# Altium PCB Midas.PcbDoc
Units mm, origin at the board's own origin, x right, y up, seen from the top; angles counter-clockwise.
Board outline 95.22 x 95.2 mm, 2 copper layers (Top Layer, Bottom Layer); 9 components, 16 nets, 67 pads, 0 vias.
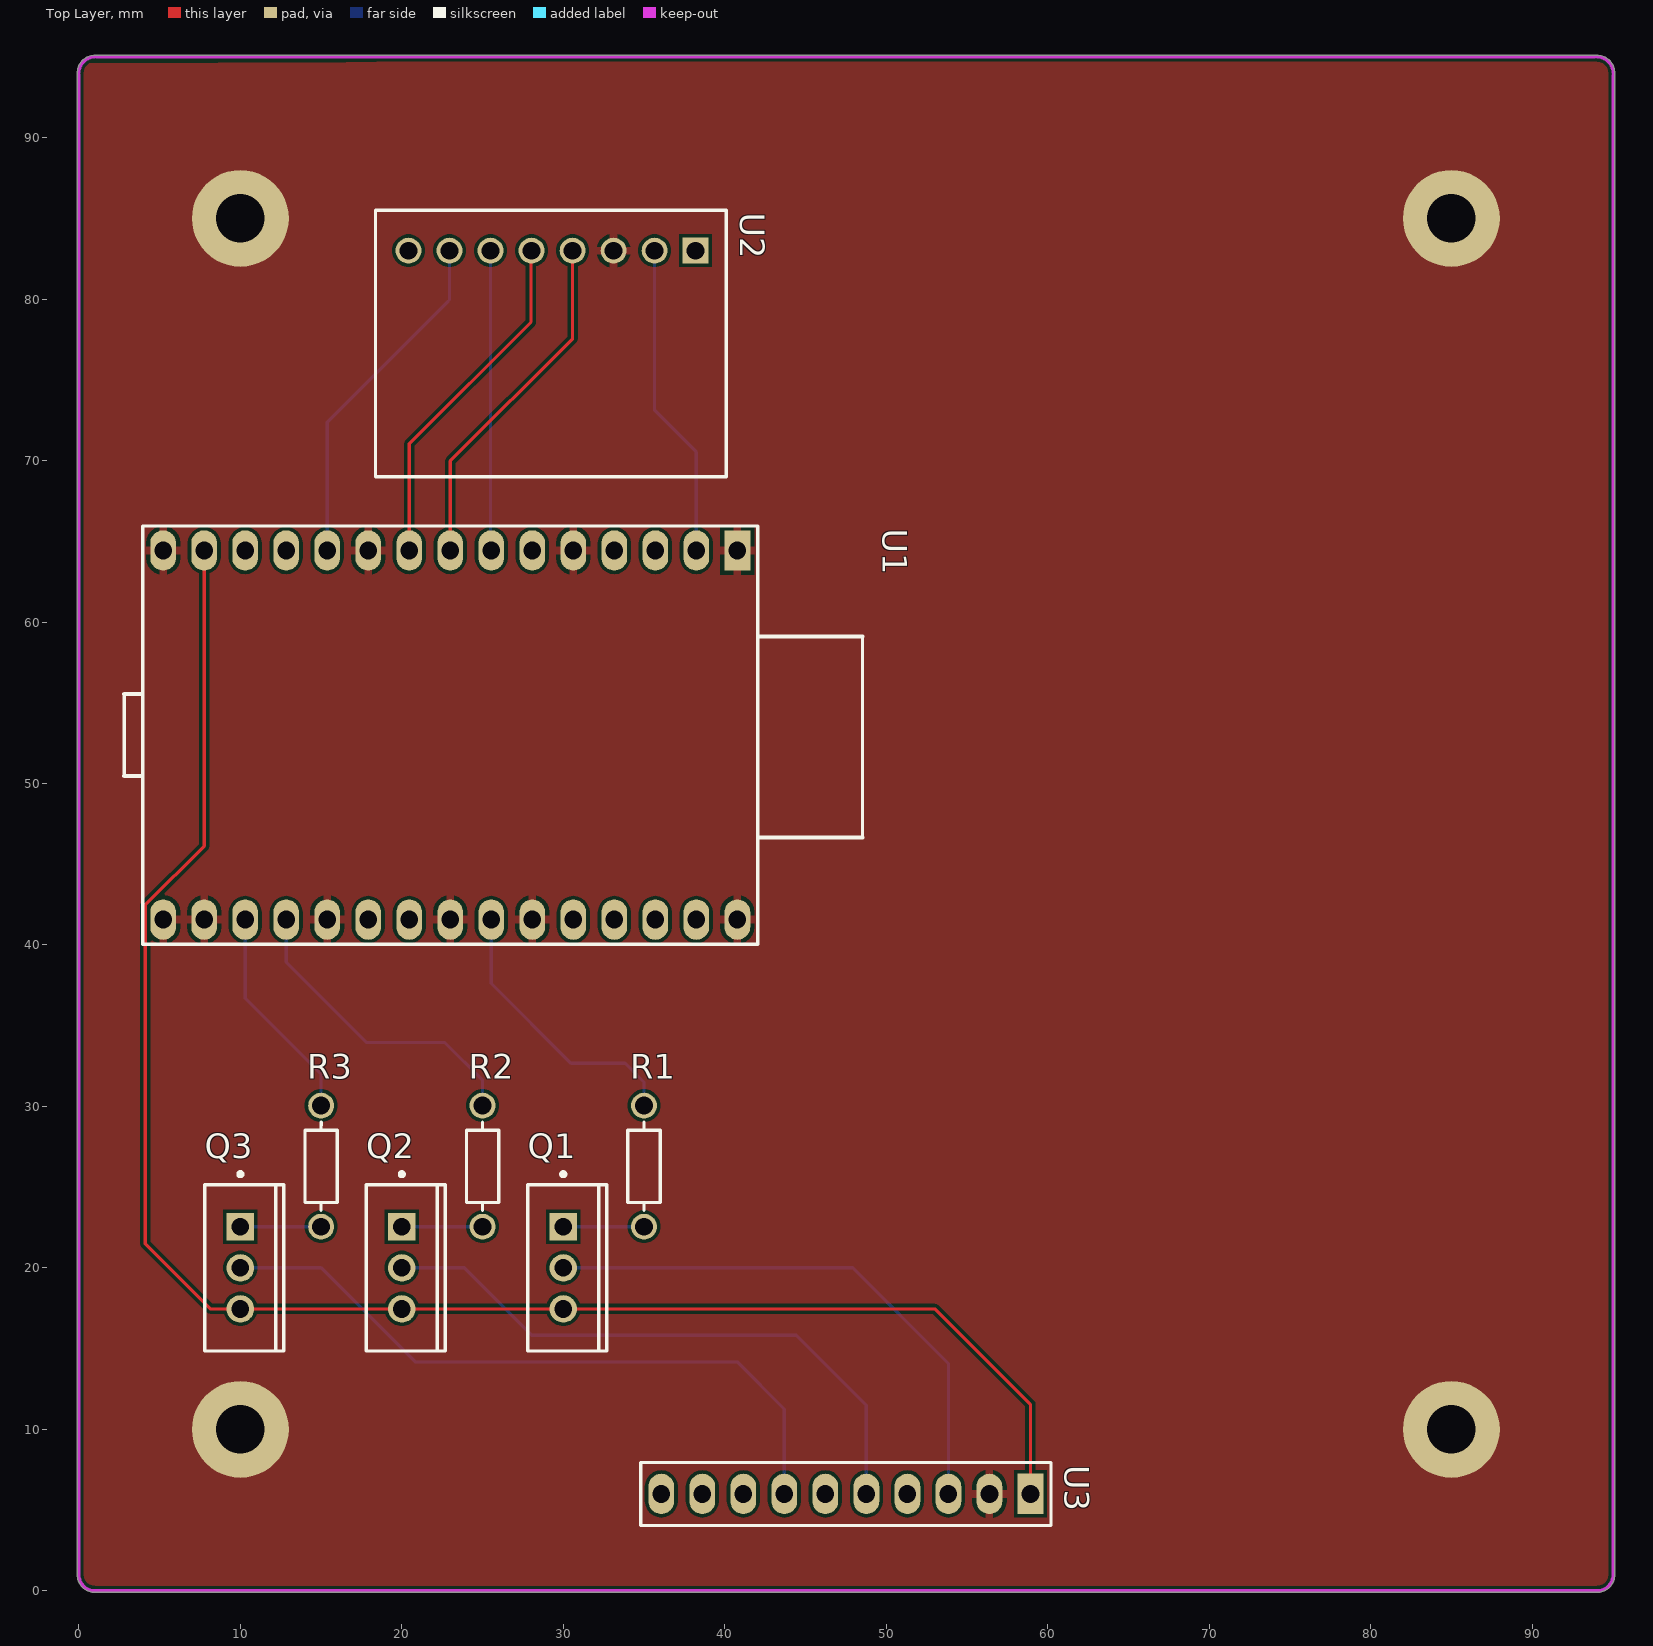
[diagram p0: Top Layer view]
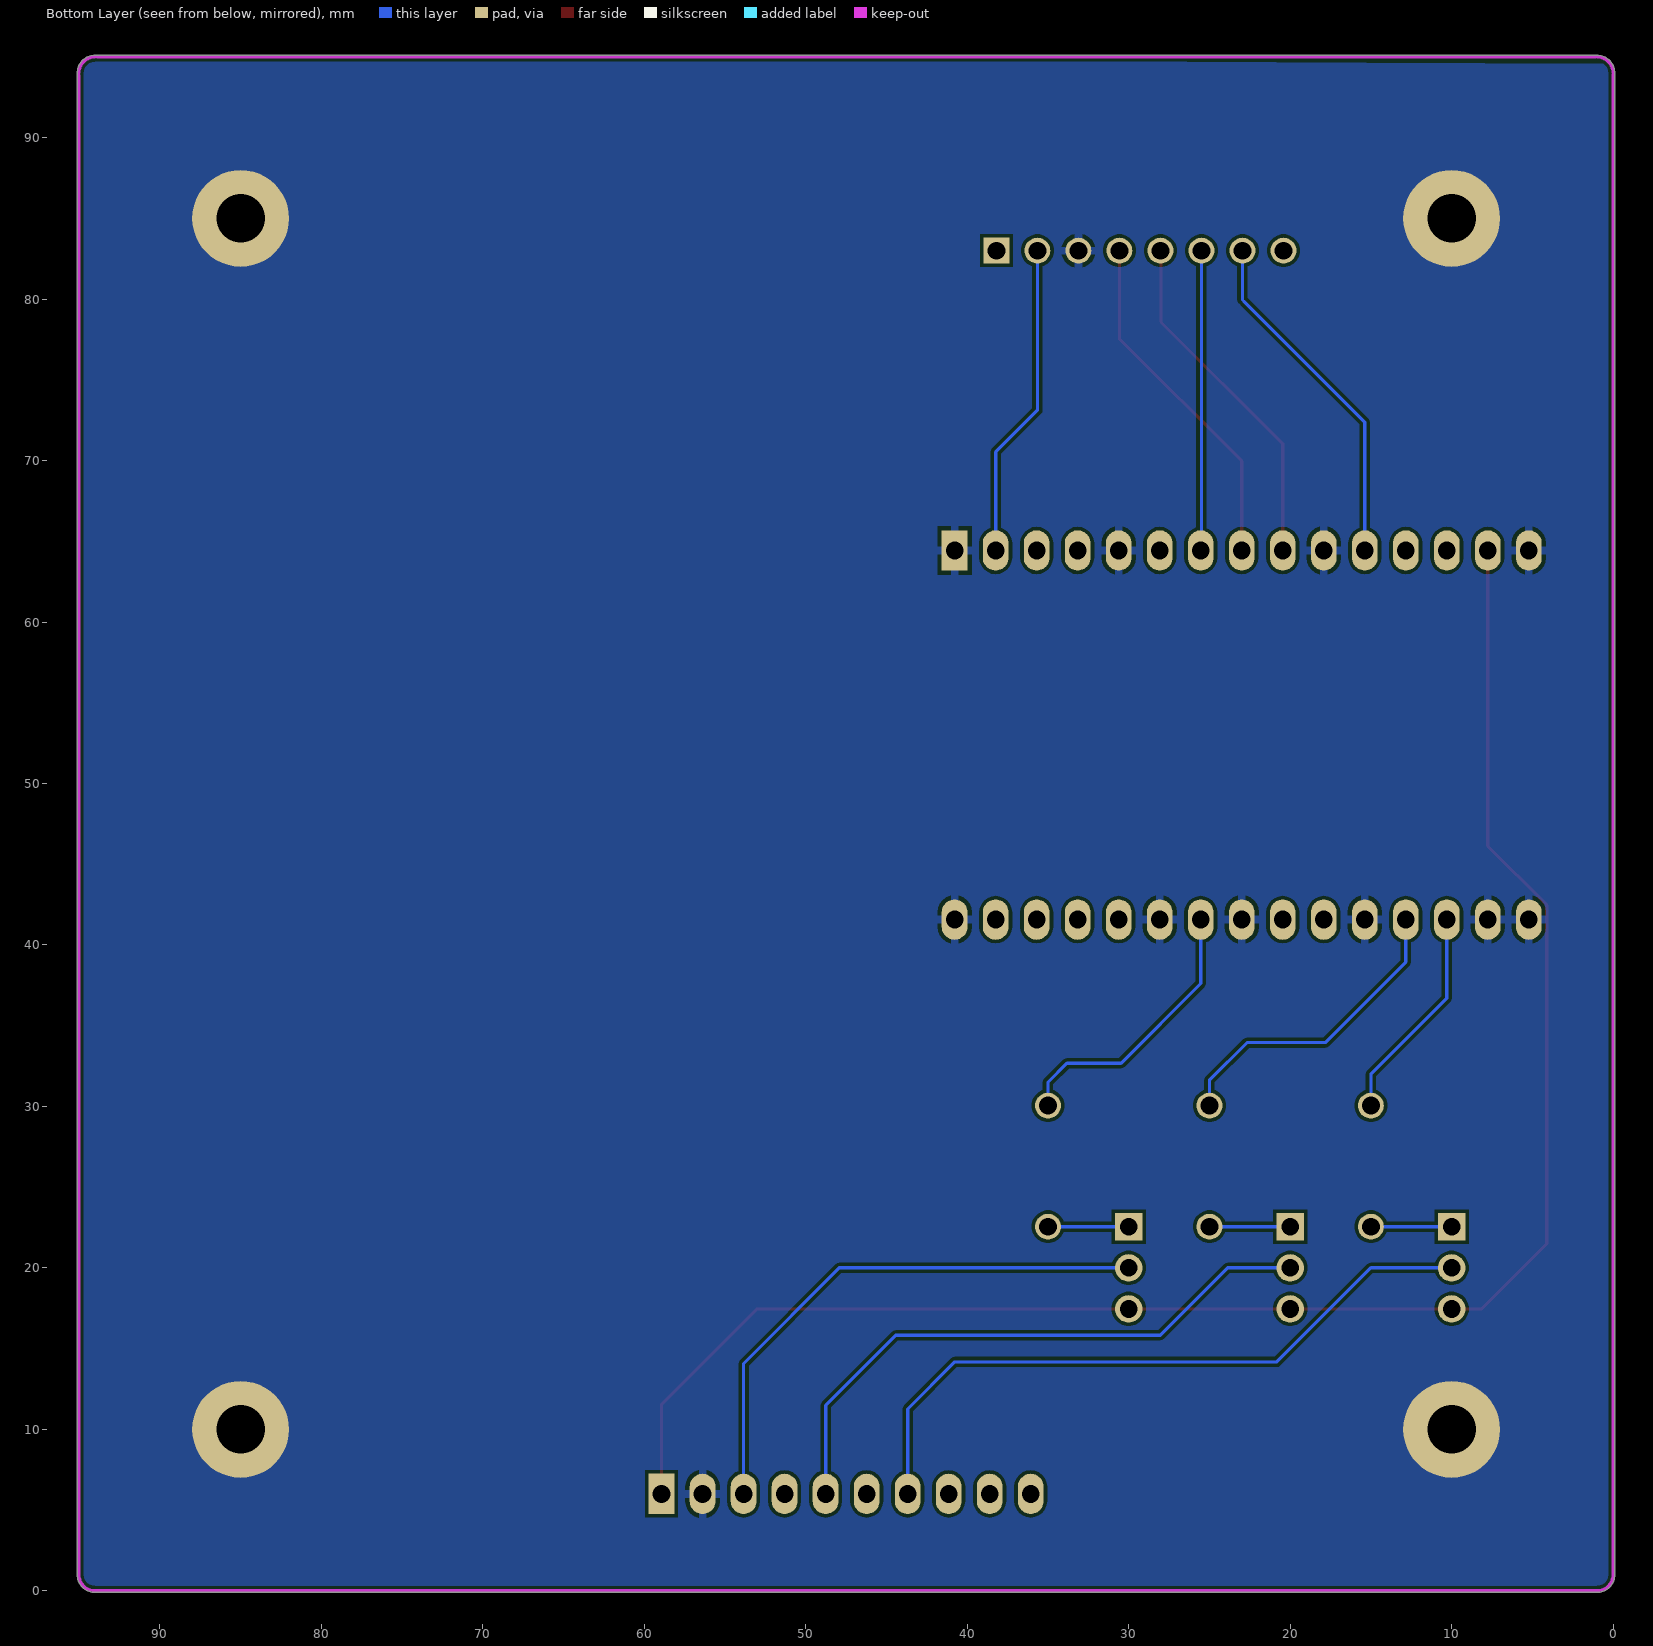
[diagram p1: Bottom Layer view, seen from below]
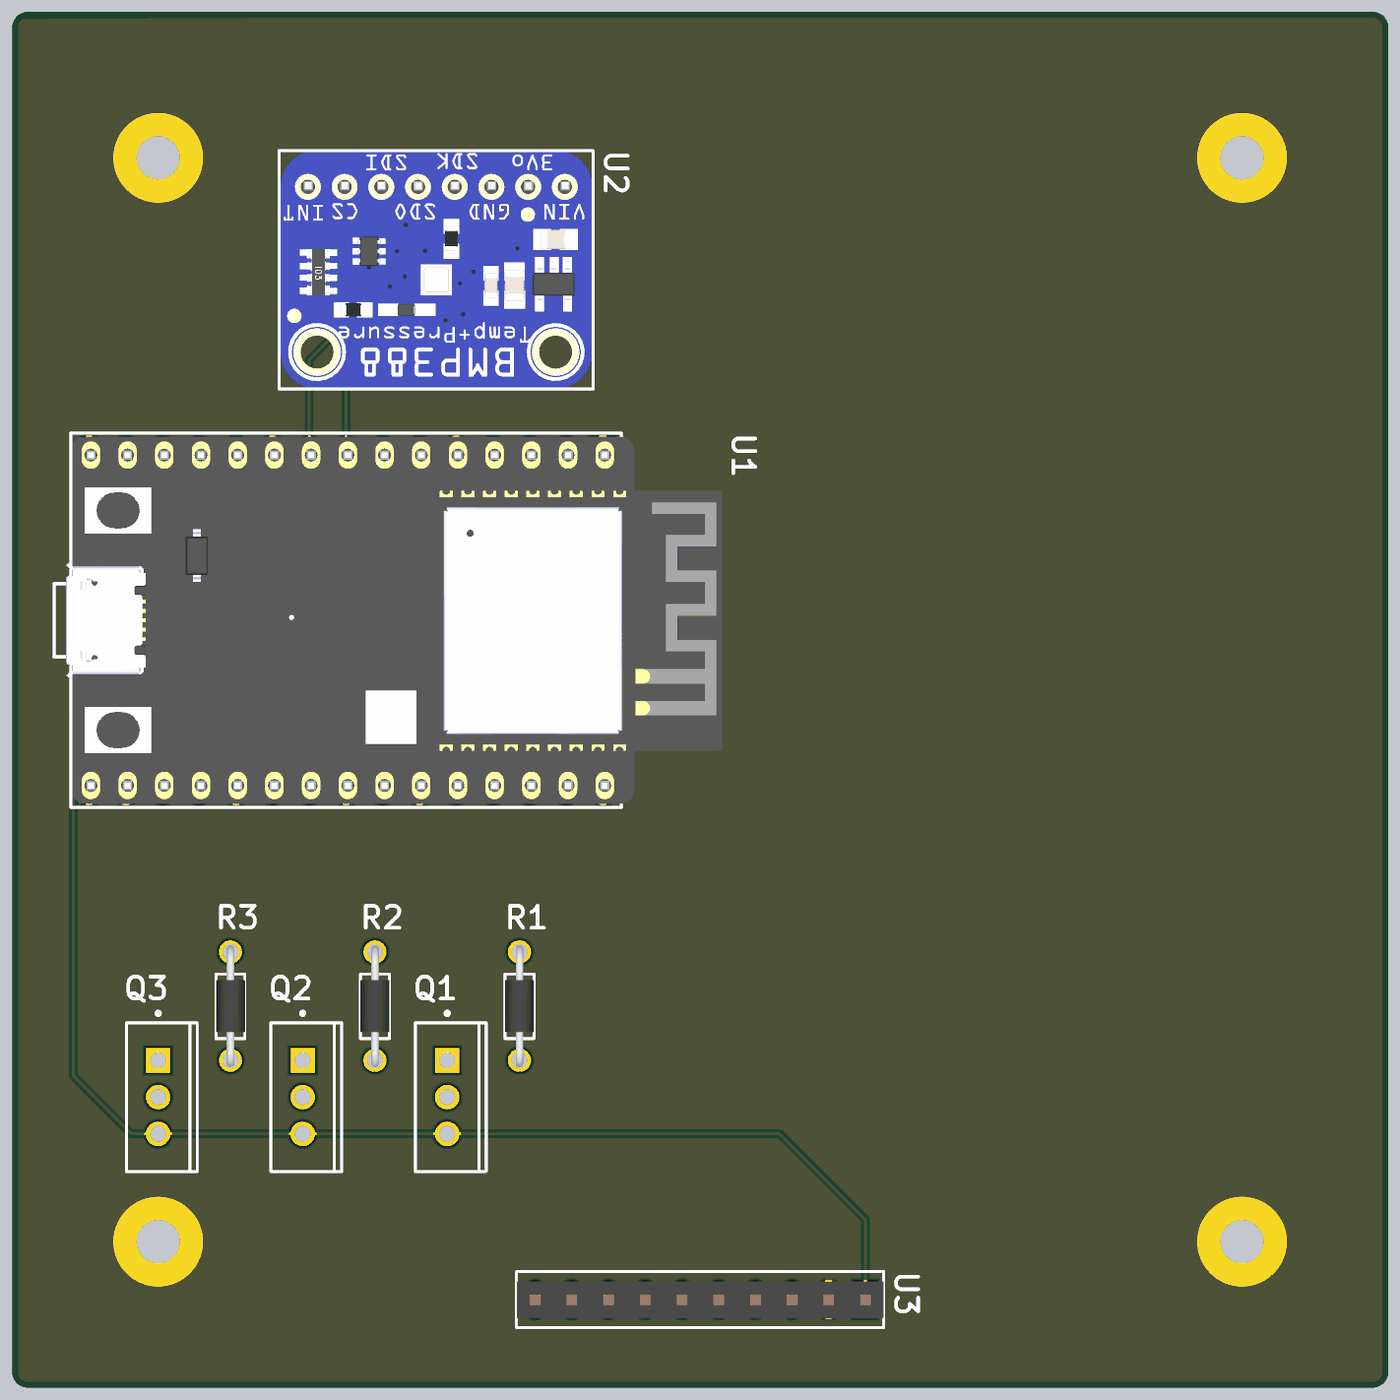
[diagram p2: 3D render of the assembled board from above, using the file's embedded part models]

## Layer stack, top to bottom
Top Solder: solder mask 0.0102, Solder Resist, Dk 3.5
Top Layer: signal copper 0.0356
Dielectric 1: dielectric 0.32, FR-4, Dk 4.8
Bottom Layer: signal copper 0.0356
Bottom Solder: solder mask 0.0102, Solder Resist, Dk 3.5

## Board outline
0.999,-0.1 cw(c1,1) -0.1,1 -0.1,94 cw(c1,94) 1,95.1 93.9,95.1 94.02,95.1 cw(c94.02,94) 95.12,94 95.12,93.88 95.12,1 cw(c94.02,1) 94.02,-0.1

## Design rules (kind name [scope] priority, off if disabled: settings)
BoardOutlineClearance [All] p1: gap=0.2 ignorepadtopadclearanceinfootprint=FALSE except(0.4: Arc-SplitBarrior Arc-SplitContinuation Track-SplitBarrior Track-SplitContinuation SMDPad-SplitBarrior SMDPad-SplitContinuation THPad-SplitBarrior THPad-SplitContinuation Via-SplitBarrior Via-SplitContinuation Fill-SplitBarrior Fill-SplitContinuation Poly-SplitBarrior Poly-SplitContinuation Region-SplitBarrior Region-SplitContinuation Text-SplitBarrior Text-SplitContinuation)
Clearance "Clearance Bottom Layer" [OnLayer('Bottom Layer')] p1: gap=0.203 ignorepadtopadclearanceinfootprint=TRUE except(0.254: Arc-Text Track-Text SMDPad-Text THPad-Text Via-Text Fill-Text Poly-Text Region-Text Text-Text)
Clearance "Clearance Top Layer" [OnLayer('Top Layer')] p2: gap=0.203 ignorepadtopadclearanceinfootprint=TRUE except(0.254: Arc-Text Track-Text SMDPad-Text THPad-Text Via-Text Fill-Text Poly-Text Region-Text Text-Text)
Clearance Clearance_1 [OnMid vs OnMid] p3: gap=0.254 ignorepadtopadclearanceinfootprint=FALSE except(0: Arc-Hole Track-Hole SMDPad-Hole THPad-Hole Via-Hole Fill-Hole Poly-Hole Region-Hole Text-Hole)
Clearance Clearance_2 [(ExistsOnLayer('Top Layer') Or ExistsOnLayer('Bottom Layer')) vs (ExistsOnLayer('Top Layer') Or ExistsOnLayer('Bottom Layer'))] p4: gap=0.254 ignorepadtopadclearanceinfootprint=FALSE except(0: Arc-Hole Track-Hole SMDPad-Hole THPad-Hole Via-Hole Fill-Hole Poly-Hole Region-Hole Text-Hole)
Clearance [All] p5: gap=0.2 ignorepadtopadclearanceinfootprint=FALSE except(0.089: Arc-Arc Arc-Track Arc-SMDPad Track-Track Track-SMDPad SMDPad-SMDPad; 0.127: Arc-Via Track-Via SMDPad-Via THPad-Via Via-Via; 0.254: Arc-Text Track-Text SMDPad-Text THPad-Text Via-Text Fill-Text Poly-Text Region-Text Text-Text)
HoleSize [All] p1: absolutevalues=TRUE maxlimit=6.3 minlimit=0.2 maxpercent=80.000 minpercent=20.000
MinimumAnnularRing [All] p1: minimumring=0.076
MinimumSolderMaskSliver [All] p1: minsoldermaskwidth=0.1
PolygonConnect PolygonConnect_1 [All] p1: thpad.connectstyle=Relief thpad.reliefconductorwidth=0.508 thpad.reliefentries=4 thpad.polygonreliefangle="90 Angle" thpad.airgapwidth=0.254 smdpad.connectstyle=Relief smdpad.reliefconductorwidth=0.508 smdpad.reliefentries=4 smdpad.polygonreliefangle="90 Angle" smdpad.airgapwidth=0.254 via.connectstyle=Direct via.reliefconductorwidth=0.508 via.reliefentries=4 via.polygonreliefangle="90 Angle" via.airgapwidth=0.254
RoutingCorners [All] p1: cornerstyle=Round minsetback=2.54 maxsetback=2.54
RoutingVias [All] p1: holewidth=0.5 width=1 viastyle="Through Hole" minholewidth=0.2 minwidth=0.45 maxholewidth=1 maxwidth=2
SilkToSilkClearance [All] p1: silktosilkclearance=0.1
SilkToSolderMaskClearance [IsPad] p1: minsilkscreentomaskgap=0.1 clearancetoexposedcopper=TRUE
SolderMaskExpansion [All] p1: expansion=0.102 istentingtop=FALSE
Width [All] p1: maxlimit=2.54 minlimit=0.089 preferedwidth=0.381
25 further rules are at their usual default settings.

## Components (designator, comment, footprint, x,y, rotation, side; value= is the part's Value field where it differs from the comment)
Q1 "TIP102" ONSC-TO-220-3-221A-09 30,20 r0 top
Q2 "TIP102" ONSC-TO-220-3-221A-09 20,20 r0 top
Q3 "TIP102" ONSC-TO-220-3-221A-09 10,20 r0 top
R1 "1.5k" CF18JT1K50 35,26.3 r90 top
R2 "1.5k" CF18JT1K50 25,26.3 r90 top
R3 "1.5k" CF18JT1K50 15,26.3 r90 top
U1 "ESP32" ESP32 23,53 r270 top
U2 "BMP388" 3966 38.195,83 r270 top
U3 "Stackable Pin Bus" STACKABLE_PIN_BUS 47.5,6 r270 top

## Footprints (in the part's own frame and the unit in brackets; to place one, negate y for a bottom-side part, rotate by r counter-clockwise, add the part's x,y. Pads: shape width x height; smd on the part's side, far side on the other; paste and mask are expansions set on the pad)
3966 [mm]
  rect 1.6x1.6 hole 1.1: 1(0,0)
  round 1.6 hole 1.1: 2(0,-2.54) 3(0,-5.08) 4(0,-7.62) 5(0,-10.16) 6(0,-12.7) 7(0,-15.24) 8(0,-17.78)
  silkscreen extent -2.5,-19.82 14,1.9, body extent -2.53,-19.74 13.98,1.85, height 1.47
CF18JT1K50 [mm]
  round 1.6 hole 1.1: 1(-3.75,0) 2(3.75,0)
  silkscreen extent -2.75,-1 2.72,1, body extent -4.2,-1 4.2,0.99, height 2.01
ESP32 [mm]
  rect 2.5x1.6 hole 1.1: 1(-11.43,17.78)
  oval 2.5x1.6 hole 1.1: 2(-11.43,15.24) 3(-11.43,12.7) 4(-11.43,10.16) 5(-11.43,7.62) 6(-11.43,5.08) 7(-11.43,2.54) 8(-11.43,0) 9(-11.43,-2.54) 10(-11.43,-5.08) 11(-11.43,-7.62) 12(-11.43,-10.16) 13(-11.43,-12.7) 14(-11.43,-15.24) 15(-11.43,-17.78) 16(11.43,-17.78) 17(11.43,-15.24) 18(11.43,-12.7) 19(11.43,-10.16) 20(11.43,-7.62) 21(11.43,-5.08) 22(11.43,-2.54) 23(11.43,0) 24(11.43,2.54) 25(11.43,5.08) 26(11.43,7.62) 27(11.43,10.16) 28(11.43,12.7) 29(11.43,15.24) 30(11.43,17.78)
  silkscreen extent -12.95,-20.19 12.95,25.53, body extent -12.7,-19.39 12.7,26.03, height 7.49
ONSC-TO-220-3-221A-09 [mm] "FM, 3-Leads, Body 10.3x4.85mm, Pitch 2.54mm"
  rect 1.7x1.7 hole 1.1: 1(0,2.54)
  round 1.7 hole 1.1: 2(0,0) 3(0,-2.54)
  silkscreen extent -2.2,-5.15 2.7,5.92, body extent -2.18,-5.15 2.67,5.15, height 19.85
STACKABLE_PIN_BUS [mm]
  rect 2.5x1.6 hole 1.1: 1(0,11.43)
  oval 2.5x1.6 hole 1.1: 2(0,8.89) 3(0,6.35) 4(0,3.81) 5(0,1.27) 6(0,-1.27) 7(0,-3.81) 8(0,-6.35) 9(0,-8.89) 10(0,-11.43)
  silkscreen extent -1.94,-12.7 1.95,12.7, body extent -1.25,-12.69 1.29,12.71, height 8

## Part data
R1 R2 R3: library part CF18JT1K50
U1: library part ESP32-C3-DEVKITC-02, Manufacturer="Espressif Systems", Supplier Part Number=1965-ESP32-C3-DEVKITC-02-ND, Category="RF Semiconductors and Devices", Manufacturer Part Number=ESP32-C3-DEVKITC-02, Pricing="1=8 (USD)", RoHS=No, Stock=1074, Supplier=Digikey
U2: library part 3966, "Test Lead, Blk, Red, 139.7MM, 500V 3V ~ 5V / Adafruit Industries LLC / BMP388 - Pressure Sensor Evaluation Board / BMP388", Manufacturer="Adafruit Industries", Supplier Part Number=1528-2733-ND, Category="Pressure Sensors", Manufacturer Part Number=3966, Pricing="1=9,95 (USD)", RoHS=No, Stock=21, Supplier=Digikey
U3: library part "Barramento Empilhável", "10 pinos, Passo 2.54mm, Dimensões da barra 26x2x8mm"

## Free pads (board coordinates)
  round 6 hole 3: GND(10,10) GND(10,85) GND(85,10) GND(85,85)

## Nets (pads, with @x,y where several pads share a name; then routed paths per layer and width w, separated by ;. In a path a pad name is that pad's centre, name@x,y a point inside that pad or via, vN(x,y) a via of type N, cw(c..) or ccw(c..) an arc to the next point about the centre after c; other vN are vias at no path point)
3V3: U1.2 U2.2 | length 19.6
  Bottom Layer w0.2: U2.2 35.655,73.12 38.24,70.535 U1.2
BA0: R1.2 U1.24 | length 17.4
  Bottom Layer w0.2: U1.24 25.54,37.61 30.475,32.675 33.825,32.675 35,31.5 R1.2
BA1: R2.2 U1.19 | length 19.2
  Bottom Layer w0.2: U1.19 12.84,38.935 17.825,33.95 22.675,33.95 25,31.625 R2.2@25,30.2
BA2: R3.2 U1.18 | length 13.5
  Bottom Layer w0.2: U1.18 10.3,36.7 14,33 15,32 R3.2@15,30
BR0: Q1.1 R1.1 | length 5
  Bottom Layer w0.2: Q1.1 R1.1@34.99,22.54
BR1: Q2.1 R2.1 | length 5
  Bottom Layer w0.2: Q2.1 R2.1@24.99,22.54
BR2: Q3.1 R3.1 | length 5
  Bottom Layer w0.2: Q3.1@10.05,22.55 R3.1
C0: Q1.2 U3.3 | length 34.4
  Bottom Layer w0.2: Q1.2 47.925,20 53.85,14.075 U3.3
C1: Q2.2 U3.5 | length 37.8
  Bottom Layer w0.2: Q2.2 23.875,20 28.05,15.825 44.425,15.825 48.77,11.48 U3.5
C2: Q3.2 U3.7 | length 42.6
  Bottom Layer w0.2: Q3.2 15,20 20.825,14.175 40.775,14.175 43.69,11.26 U3.7
CLK: U1.8 U2.4 | length 21.7
  Top Layer w0.2: U1.8 23,69.975 30.575,77.55 U2.4
CS: U1.11 U2.7 | length 21.5
  Bottom Layer w0.2: U1.11 15.38,72.38 22.84,79.84 ; 22.955,79.955 U2.7
GND: pad.GND U1.1 U1.5 U1.10 U1.15 U1.16 U1.17 U1.20 U1.23 U1.25 U1.30 U2.3 U3.2
MISO: U1.7 U2.6 | length 18.4
  Bottom Layer w0.2: U1.7@25.495,64.595 U2.6
MOSI: U1.9 U2.5 | length 21.7
  Top Layer w0.2: U1.9 20.46,71.035 28,78.575 U2.5@28,82.965
VIN: Q1.3 Q2.3 Q3.3 U1.14 U3.1 | length 108.9
  Top Layer w0.2: U1.14 7.76,46.12 4.117,42.477 4.117,21.483 8.14,17.46 Q3.3 Q2.3 Q1.3 53.015,17.46 58.93,11.545 U3.1
pads on no net: U1.3 U1.4 U1.6 U1.12 U1.13 U1.21 U1.22 U1.26 U1.27 U1.28 U1.29 U2.1 U2.8 U3.4 U3.6 U3.8 U3.9 U3.10

## Polygon pours and split planes (outlines as drawn)
GND on Bottom Layer "GND_BOTTOM" (solid, pour order 2): 0.35,94.56 0,94.21 0,-0.015 -0.05,-0.015 0,0.035 95.025,0.035 95.025,94.985 94.975,95.035
GND on Top Layer "GND_TOP" (solid, pour order 0): 0.35,94.6 0,94.25 0,0.025 -0.05,0.025 0,0.075 95.025,0.075 95.025,95.025 94.975,95.075

## Keep-outs
Keep-Out Layer:
  lines w0.2: 0,93.9 0,1 ccw(c1,1) 1,0 94.02,0 ccw(c94.02,1) 95.02,1 95.02,93.88 ; 0,94 cw(c1,94) 1,95 ; 1.1,95 93.9,95 ; 94.02,95 cw(c94.02,94) 95.02,94